# EAGLE board EGB240_Assessment1A_PCB_n10496262 (EAGLE 9.5.2)
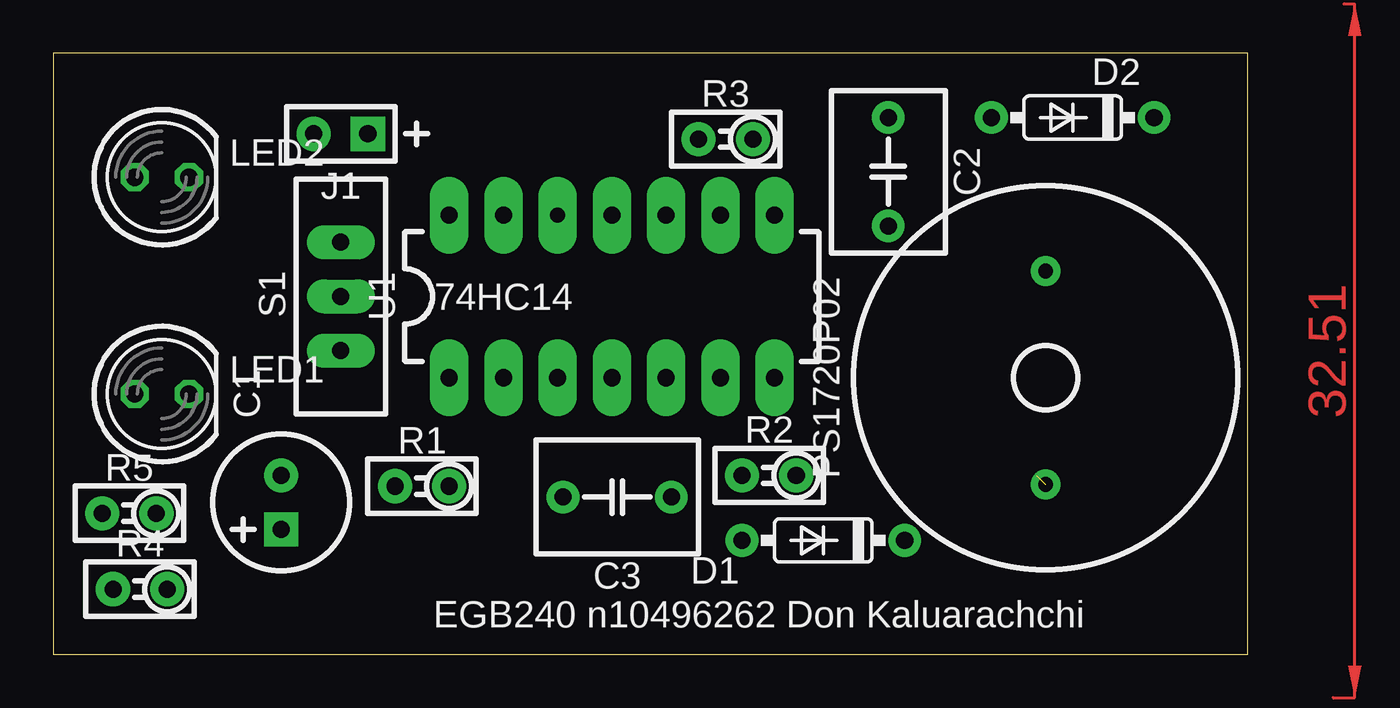
[diagram p0: board, top side]
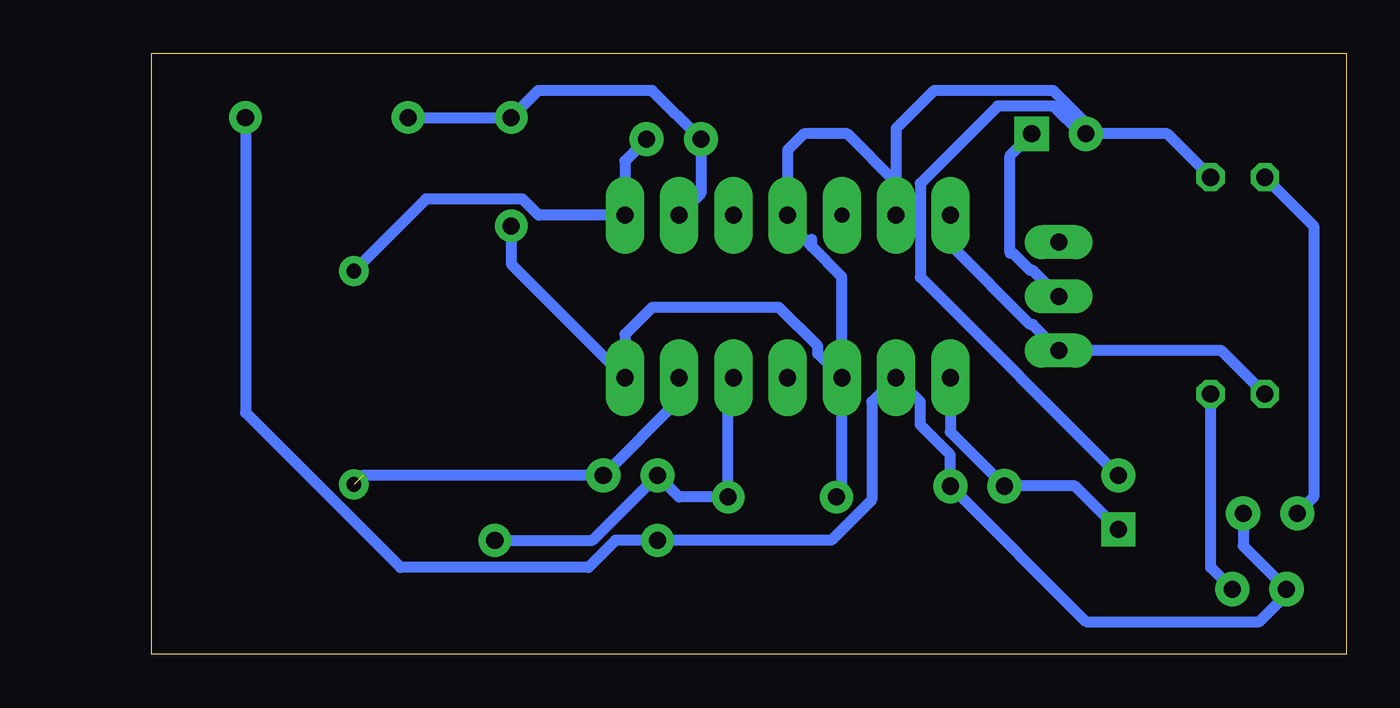
[diagram p1: board, bottom side, seen from below]

Size 55.95 x 28.16 mm. Coordinates in mm from the lower left corner, seen from the top.
Outline: 0,0 55.95,0 55.95,28.16 0,28.16 0,0
Copper layers (1*16): Top 0.035mm / dielectric 1.5mm / Bottom 0.035mm
Design rules "default *": minimum track width 10mil, minimum drill 20mil, track to track 10mil, track to pad 10mil, pad to pad 10mil, via to via 10mil, smd to smd 8mil, copper to edge 1mm, drill to drill 20mil, minimum pad ring 10mil, minimum via ring 8mil, stop-mask expansion 4mil, vias tented up to drill 0mil, thermal gap 10mil
bKeepout: 4 lines

## Footprints (pad centres in the part's own frame; a part is rotated, then mirrored left to right if it is on the bottom)
CAP-RB-P2.54-D6.3 = drill 0.8 pad 1.6 square: P$1 -1.27,0 | drill 0.8 pad 1.6: P$2 1.27,0
CAP-MKT-7.5X5.0-P5.08 = drill 0.8 pad 1.524: P$1 -2.54,0; P$2 2.54,0
DO35-P7.62 = drill 0.8 pad 1.524: A 3.81,0; K -3.81,0
BATT-3V = drill 0.8 pad 1.6 square: P$1 -1.27,0 | drill 0.8 pad 1.6: P$2 1.27,0
LED5MM = drill 0.813 octagon: A -1.27,0; K 1.27,0
PS1720P02 = drill 0.7 pad 1.4: P$1 -5,0; P$2 5,0
AXIAL-P2.54 = drill 0.8 pad 1.6: P$1 -1.27,0; P$2 1.27,0
SS-12 = drill 0.8 pad 1.6 long: 1 0,2.54; 2 0,0; 3 0,-2.54
DIP-14 = drill 0.8 pad 1.8 long: P$1 -3.81,7.62; P$2 -3.81,5.08; P$3 -3.81,2.54; P$4 -3.81,0; P$5 -3.81,-2.54; P$6 -3.81,-5.08; P$7 -3.81,-7.62; P$8 3.81,-7.62; P$9 3.81,-5.08; P$10 3.81,-2.54; P$11 3.81,0; P$13 3.81,5.08; P$14 3.81,7.62 | drill 0.7 pad 1.8 long: P$12 3.81,2.54

## Placement (x,y rotation side)
C1  10uF  [CAP-RB-P2.54-D6.3]  10.67,7.11 90 top
C2  27.3nF  [CAP-MKT-7.5X5.0-P5.08]  39.12,22.61 270 top
C3  39.3nF  [CAP-MKT-7.5X5.0-P5.08]  26.42,7.37 180 top
D1  [DO35-P7.62]  36.07,5.33 180 top
D2  [DO35-P7.62]  47.75,25.15 180 top
J1  [BATT-3V]  13.46,24.38 180 top
LED1  [LED5MM]  5.08,12.19 0 top
LED2  [LED5MM]  5.08,22.35 0 top
PS1720P02  [PS1720P02]  46.48,12.95 90 top
R1  68k  [AXIAL-P2.54]  17.27,7.87 0 top
R2  10k  [AXIAL-P2.54]  33.53,8.38 0 top
R3  10k  [AXIAL-P2.54]  31.5,24.13 0 top
R4  100  [AXIAL-P2.54]  4.06,3.05 0 top
R5  100  [AXIAL-P2.54]  3.56,6.6 0 top
S1  [SS-12]  13.46,16.76 0 top
U1  74HC14  [DIP-14]  26.16,16.76 90 top

## Library data of the parts
C1-C3 D1 D2 J1 PS1720P02 R1-R5 S1 U1 = EGB240(1)
LED1 LED2 = led

## Nets
+3V: LED1.A S1.3 U1.P$14
GND: C1.P$2 C2.P$2 C3.P$2 J1.P$2 LED2.K U1.P$3 U1.P$7 U1.P$11 U1.P$13
N$1: PS1720P02.P$2 R3.P$2 U1.P$8
N$2: J1.P$1 S1.2
N$3: C1.P$1 R1.P$1 U1.P$1
N$4: LED1.K R4.P$2
N$5: PS1720P02.P$1 R2.P$2 U1.P$6
N$6: C3.P$1 D1.K R2.P$1 U1.P$5
N$7: C2.P$1 D2.A R3.P$1 U1.P$9
N$8: D1.A D2.K R1.P$2 R4.P$1 R5.P$2 U1.P$2
N$9: LED2.A R5.P$1

## Tracks (layer width: path | path; a pad name or v marks a point on that pad's centre or on a via)
+3V
  Bottom 0.508: U1.P$14 18.54,19.19 14.8,15.46 14.69,15.46 S1.3 5.84,14.22 LED1.A
GND
  Bottom 0.508: J1.P$2 12.19,24.89 13.72,26.42 19.3,26.42 21.08,24.64 U1.P$13 21.08,22.1 23.37,24.38 25.4,24.38 26.16,23.62 U1.P$11 26.16,20.22 25.03,19.09 | 25.03,19.09 25.03,19.44 | U1.P$3 23.62,17.68 25.03,19.09 | C3.P$2 23.62,7.62 U1.P$3 | U1.P$3 24.75,14.09 24.75,14.44 26.57,16.26 32.51,16.26 33.78,14.99 U1.P$7 39.12,18.29 C2.P$2 | C1.P$2 19.95,17.66 19.95,22.06 16.32,25.69 13.72,25.69 12.41,24.38 J1.P$2 | LED2.K 8.38,24.38 J1.P$2
N$1
  Bottom 0.508: R3.P$2 33.78,23.11 U1.P$8 37.83,20.57 38.59,21.34 43.1,21.34 PS1720P02.P$2
N$2
  Bottom 0.508: S1.2 14.69,18 14.8,18 15.6,18.8 15.75,18.8 15.75,23.37 J1.P$1
N$3
  Bottom 0.508: C1.P$1 12.7,7.87 R1.P$1 18.54,10.41 U1.P$1
N$4
  Bottom 0.508: R4.P$2 6.35,4.06 LED1.K
N$5  (1 unrouted)
  Bottom 0.508: U1.P$6 31.24,11.94 R2.P$2 46.05,8.38
N$6
  Bottom 0.508: U1.P$5 28.96,12.7 C3.P$1 31.24,7.37 R2.P$1 35.31,5.33 D1.K
N$7
  Bottom 0.508: U1.P$9 30.23,21.59 R3.P$1 32.51,26.42 37.85,26.42 C2.P$1 39.37,25.4 39.62,25.15 D2.A
N$8
  Bottom 0.508: D2.K 51.56,11.33 44.3,4.06 35.5,4.06 34.23,5.33 D1.A 24.11,5.33 22.21,7.23 22.21,11.82 U1.P$2 19.95,11.82 19.95,10.74 18.54,9.34 R1.P$2 12.19,1.52 4.06,1.52 2.92,2.67 2.92,3.18 | R5.P$2 4.83,5.08 2.92,3.18 | 2.92,3.18 R4.P$1
N$9
  Bottom 0.508: LED2.A 1.52,20.07 1.52,7.37 R5.P$1
(copper drawn outside any net)
  shapes: Top area x3

## Text on the board
tPlace: EGB240 n10496262 Don Kaluarachchi